# Altium PCB PCB2.0 4mm.PcbDoc
Units mm, origin at the board's own origin, x right, y up, seen from the top; angles counter-clockwise.
Board outline 152.4 x 101.6 mm, 2 copper layers (Top Layer, Bottom Layer); 60 components, 24 nets, 235 pads, 0 vias.
Unrouted connection lines stored in the file: 4.
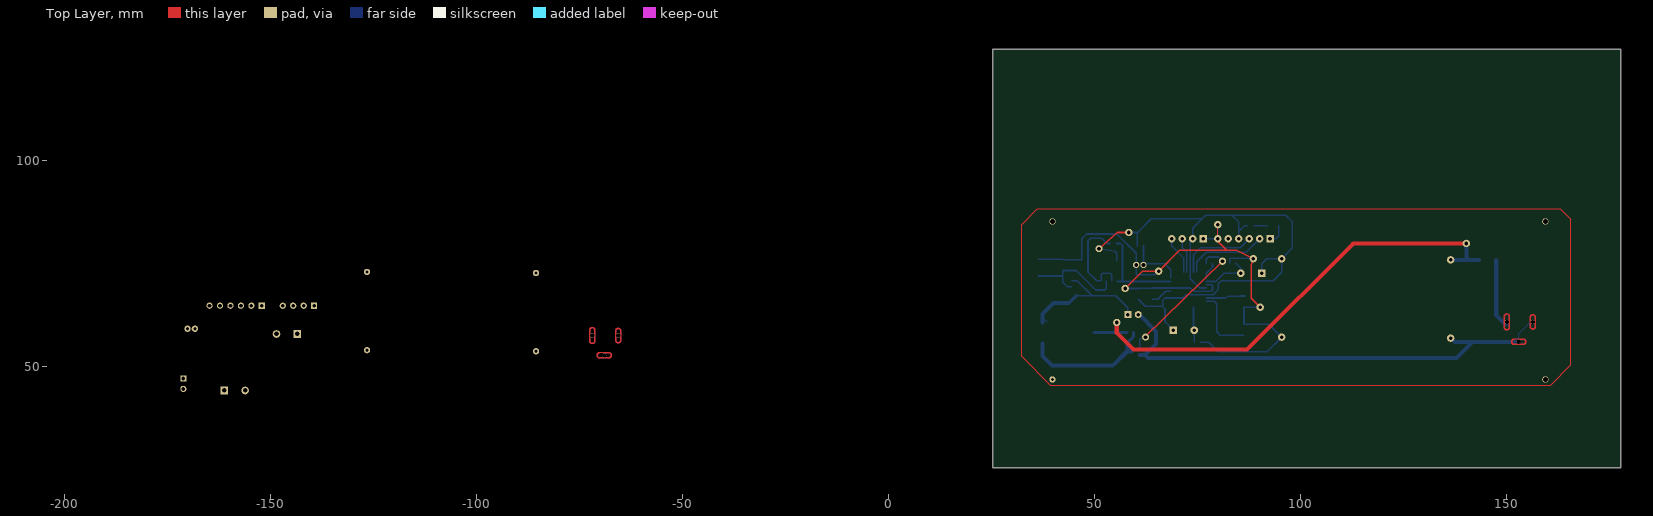
[diagram p0: Top Layer view]
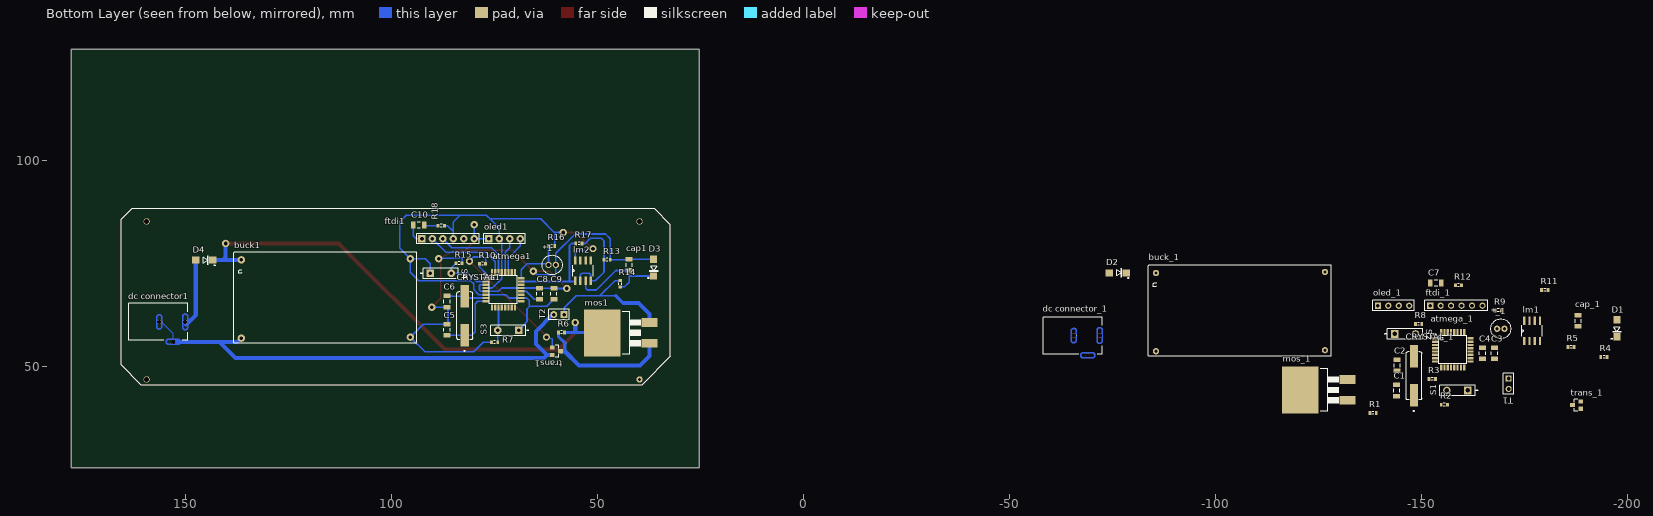
[diagram p1: Bottom Layer view, seen from below]

## Layer stack, top to bottom
Top Solder: solder mask 0.0102, Solder Resist, Dk 3.5
Top Layer: signal copper 0.0356
Dielectric 1: dielectric 0.32, FR-4, Dk 4.8
Bottom Layer: signal copper 0.0356
Bottom Solder: solder mask 0.0102, Solder Resist, Dk 3.5

## Board outline
25.4,25.4 177.8,25.4 177.8,127 25.4,127

## Design rules (kind name [scope] priority, off if disabled: settings)
Clearance Clearance_2 [All] p1: gap=0.1 ignorepadtopadclearanceinfootprint=FALSE
Clearance Clearance_1 [All] p2: gap=0.1 ignorepadtopadclearanceinfootprint=FALSE
Clearance [All] p3: gap=0.1 ignorepadtopadclearanceinfootprint=FALSE
PolygonConnect [All] p1: connectstyle=Relief reliefconductorwidth=0.254 reliefentries=4 polygonreliefangle="90 Angle" airgapwidth=0.254
RoomDefinition soldering_iron [InComponentClass('soldering_iron')] p1: confinementstyle=ConfineOut formatcopy=TRUE lockcomponents=FALSE outline 21.336,110.363 22.872,110.363 22.872,45.593 21.336,45.593
RoutingVias [All] p1: holewidth=0.711 width=1.27 viastyle="Through Hole" minholewidth=0.711 minwidth=1.27 maxholewidth=0.711 maxwidth=1.27
SolderMaskExpansion [All] p1: expansion=0.102
UnRoutedNet [All] p1: checkbadconnections=TRUE
Width [All] p1: maxlimit=0.4 minlimit=0.4 preferedwidth=0.4 minimp=50.000000 maximp=50.000000 favimp=50.000000
29 further rules are at their usual default settings.

## Classes and differential pairs
component class soldering_iron: *1 atmega1 buck1 C5 C6 C8 C9 C10 cap1 CRYSTAL1 D3 D4 "dc connector1" lm2 mos1 oled1 R6 R7 R10 R13 R14 R15 R16 R17 R18 S3 S4 T2 trans1

## Components (designator, comment, footprint, x,y, rotation, side; value= is the part's Value field where it differs from the comment)
*1 "Vibration sensor" PCBComponent_1#1 61.976,74.676 r180 bottom (schematic designator *)
*_1 "Vibration sensor" PCBComponent_1#2 -168.275,59.182 r180 bottom (schematic designator *)
atmega1 "ATMEGA328P-AU" *QFP80P900X900X120-32N 72.91,68.656 r180 bottom (schematic designator atmega)
atmega_1 "ATMEGA328P-AU" *QFP80P900X900X120-32N -157.48,54.051 r180 bottom (schematic designator atmega)
buck1 "buck" buck#1 136.525,75.896 r270 bottom (schematic designator buck)
buck_1 "buck" buck#2 -85.471,72.721 r270 bottom (schematic designator buck)
C1 "Cap Semi" C1206 -143.891,44.196 r270 bottom value=22pF (schematic designator C4)
C2 "Cap Semi" C1206 -144.018,50.292 r90 bottom value=22pF (schematic designator C3)
C3 "Cap Semi" C1206 -167.64,53.213 r90 bottom value=0.1uF (schematic designator C1)
C4 "Cap Semi" C1206 -164.719,53.213 r270 bottom value=0.1uF (schematic designator C2)
C5 "Cap Semi" C1206 86.614,58.928 r270 bottom value=22pF (schematic designator C4)
C6 "Cap Semi" C1206 86.614,65.786 r90 bottom value=22pF (schematic designator C3)
C7 "Cap Semi" C1206 -153.416,70.231 r180 bottom value=0.1uF (schematic designator C5)
C8 "Cap Semi" C1206 64.135,67.691 r270 bottom value=0.1uF (schematic designator C2)
C9 "Cap Semi" C1206 60.706,67.691 r90 bottom value=0.1uF (schematic designator C1)
C10 "Cap Semi" C1206 93.472,84.328 r180 bottom value=0.1uF (schematic designator C5)
cap1 "Cap Semi" C1206 42.418,74.676 r270 bottom value=2.2nF (schematic designator cap)
cap_1 "Cap Semi" C1206 -187.96,61.087 r90 bottom value=2.2nF (schematic designator cap)
CRYSTAL1 "FOXSDLF/160-20" *XTAL_FOXSDLF/160-20 82.308,62.357 r90 bottom (schematic designator CRYSTAL)
CRYSTAL_1 "FOXSDLF/160-20" *XTAL_FOXSDLF/160-20 -148.082,47.752 r90 bottom (schematic designator CRYSTAL)
D1 "SS12-E3/61T" *DO214AC_SS12-E3/61T(Primary) -197.358,59.309 r90 bottom (schematic designator D2)
D2 "SS12-E3/61T" *DO214AC_SS12-E3/61T(Primary) -76.2,72.771 r0 bottom (schematic designator D1)
D3 "SS12-E3/61T" *DO214AC_SS12-E3/61T(Primary) 36.449,74.041 r90 bottom (schematic designator D2)
D4 "SS12-E3/61T" *DO214AC_SS12-E3/61T(Primary) 145.542,75.819 r0 bottom (schematic designator D1)
"dc connector1" "DCJ235-05-A-XX-X_REVA" *GCT_DCJ235-05-A-XX-X_REVA 156.718,60.833 r270 bottom (schematic designator "dc connector")
"dc connector_1" "DCJ235-05-A-XX-X_REVA" *GCT_DCJ235-05-A-XX-X_REVA -65.267,57.531 r270 bottom (schematic designator "dc connector")
ftdi1 "Header 6" HDR1X6#1 92.71,81.026 r180 bottom (schematic designator ftdi)
ftdi_1 "Header 6" HDR1X6#2 -152.019,64.77 r180 bottom (schematic designator ftdi)
lm1 "LM358DR" *SOIC127P600X175-8N -176.784,58.674 r90 bottom (schematic designator lm35dr)
lm2 "LM358DR" *SOIC127P600X175-8N 53.606,73.279 r90 bottom (schematic designator lm35dr)
mos1 "IRF540NPBF" *D2PACK 46.355,58.166 r90 bottom (schematic designator mos)
mos_1 "IRF540NPBF" *D2PACK -123.063,44.323 r90 bottom (schematic designator mos)
oled1 "Header 4" HDR1X4#1 76.454,81.026 r180 bottom (schematic designator oled)
oled_1 "Header 4" HDR1X4#2 -139.319,64.77 r180 bottom (schematic designator oled)
R1 "Res1" J1-0603 -138.176,38.735 r0 bottom value=1K
R2 "Res9" J1-0603 -155.448,40.767 r180 bottom value=1K (schematic designator R9)
R3 "Res 2" J1-0603 -152.527,46.99 r180 bottom value=1K (schematic designator R2)
R4 "Res4" J1-0603 -194.183,52.324 r180 bottom value=1K
R5 "Res6" J1-0603 -186.182,54.737 r180 bottom value=10K (schematic designator R6)
R6 "Res1" J1-0603 58.801,58.293 r180 bottom value=1K (schematic designator R1)
R7 "Res9" J1-0603 75.057,55.88 r180 bottom value=1K (schematic designator R9)
R8 "Res8" J1-0603 -149.225,60.325 r0 bottom value=1K
R9 "Res7" J1-0603 -168.529,63.627 r0 bottom value=10K (schematic designator R7)
R10 "Res 2" J1-0603 77.978,74.93 r0 bottom value=1K (schematic designator R2)
R11 "Res3" J1-0603 -179.832,68.58 r0 bottom value=200K (schematic designator R3)
R12 "Res5" J1-0603 -158.877,69.723 r180 bottom value=10K (schematic designator R5)
R13 "Res4" J1-0603 47.752,75.946 r0 bottom value=1K (schematic designator R4)
R14 "Res6" J1-0603 44.577,70.104 r270 bottom value=10K (schematic designator R6)
R15 "Res8" J1-0603 83.693,75.057 r0 bottom value=1K (schematic designator R8)
R16 "Res7" J1-0603 61.214,79.248 r0 bottom value=10K (schematic designator R7)
R17 "Res3" J1-0603 54.61,79.883 r0 bottom value=200K (schematic designator R3)
R18 "Res5" J1-0603 88.011,84.201 r180 bottom value=10K (schematic designator R5)
S1 "SW-SPST" SPST-2#1 -158.623,44.196 r0 bottom (schematic designator S2)
S2 "SW-SPST" SPST-2#1 -145.923,57.912 r180 bottom (schematic designator S1)
S3 "SW-SPST" SPST-2#2 71.767,58.801 r0 bottom (schematic designator S2)
S4 "SW-SPST" SPST-2#2 88.138,72.644 r180 bottom (schematic designator S1)
T1 "T12" HDR1X2#1 -171.069,47.117 r270 bottom (schematic designator T12)
T2 "T12" HDR1X2#2 58.166,62.611 r0 bottom (schematic designator T12)
trans1 "npn trans" *SOT-23 60.071,53.721 r270 bottom (schematic designator trans)
trans_1 "npn trans" *SOT-23 -187.579,40.64 r90 bottom (schematic designator trans)

## Footprints (in the part's own frame and the unit in brackets; to place one, negate y for a bottom-side part, rotate by r counter-clockwise, add the part's x,y. Pads: shape width x height; smd on the part's side, far side on the other; paste and mask are expansions set on the pad)
*D2PACK [mil]
  rect 82x150 smd: 1(-100,-350) 3(100,-350)
  rect 450x350 smd: 2(0,100)
  silkscreen extent -202,-265 202,-91
*DO214AC_SS12-E3/61T(Primary) [mm]
  rect 1.8x1.7 smd: A(2.05,0) C(-2.05,0)
  silkscreen extent -2.67,-1.05 0.25,1.4
*GCT_DCJ235-05-A-XX-X_REVA [mm]
  rect 0.1x0.1 smd: 1(0,5.95) 2(0,0.9) 3(4.2,3.65)
  round 1 hole 1 unplated: None(0,0.25) None(0,6.55) None(4.8,3.65)
  Top Layer region: 0,6.05 0,5.8 1.3,5.8 1.32,5.8 1.359,5.802 1.398,5.806 1.437,5.812 1.475,5.82 1.513,5.831 1.55,5.843 1.587,5.857 1.623,5.873 1.658,5.891 1.692,5.91 1.725,5.932 1.757,5.955 1.787,5.98 1.816,6.006 1.844,6.034 1.87,6.063 1.895,6.093 1.918,6.125 1.94,6.158 1.959,6.192 1.977,6.227 1.993,6.263 2.007,6.3 2.019,6.337 2.03,6.375 2.038,6.413 2.044,6.452 2.048,6.491 2.05,6.53 2.05,6.55 2.05,6.57 2.048,6.609 2.044,6.648 2.038,6.687 2.03,6.725 2.019,6.763 2.007,6.8 1.993,6.837 1.977,6.873 1.959,6.908 1.94,6.942 1.918,6.975 1.895,7.007 1.87,7.037 1.844,7.066 1.816,7.094 1.787,7.12 1.757,7.145 1.725,7.168 1.692,7.19 1.658,7.209 1.623,7.227 1.587,7.243 1.55,7.257 1.513,7.269 1.475,7.28 1.437,7.288 1.398,7.294 1.359,7.298 1.32,7.3 1.3,7.3 0,7.3 0,7.05 1.3,7.05 1.313,7.05 1.339,7.049 1.365,7.046 1.391,7.042 1.417,7.036 1.442,7.03 1.467,7.021 1.491,7.012 1.515,7.001 1.539,6.99 1.561,6.976 1.583,6.962 1.604,6.947 1.625,6.93 1.644,6.913 1.663,6.894 1.68,6.875 1.697,6.854 1.712,6.833 1.726,6.811 1.74,6.789 1.751,6.765 1.762,6.741 1.771,6.717 1.78,6.692 1.786,6.667 1.792,6.641 1.796,6.615 1.799,6.589 1.8,6.563 1.8,6.55 1.8,6.537 1.799,6.511 1.796,6.485 1.792,6.459 1.786,6.433 1.78,6.408 1.771,6.383 1.762,6.359 1.751,6.335 1.74,6.311 1.726,6.289 1.712,6.267 1.697,6.246 1.68,6.225 1.663,6.206 1.644,6.187 1.625,6.17 1.604,6.153 1.583,6.138 1.561,6.124 1.539,6.11 1.515,6.099 1.491,6.088 1.467,6.079 1.442,6.07 1.417,6.064 1.391,6.058 1.365,6.054 1.339,6.051 1.313,6.05 1.3,6.05 0,6.05
  Top Layer region: 0,7.05 0,7.3 -1.3,7.3 -1.32,7.3 -1.359,7.298 -1.398,7.294 -1.437,7.288 -1.475,7.28 -1.513,7.269 -1.55,7.257 -1.587,7.243 -1.623,7.227 -1.658,7.209 -1.692,7.19 -1.725,7.168 -1.757,7.145 -1.787,7.12 -1.816,7.094 -1.844,7.066 -1.87,7.037 -1.895,7.007 -1.918,6.975 -1.94,6.942 -1.959,6.908 -1.977,6.873 -1.993,6.837 -2.007,6.8 -2.019,6.763 -2.03,6.725 -2.038,6.687 -2.044,6.648 -2.048,6.609 -2.05,6.57 -2.05,6.55 -2.05,6.53 -2.048,6.491 -2.044,6.452 -2.038,6.413 -2.03,6.375 -2.019,6.337 -2.007,6.3 -1.993,6.263 -1.977,6.227 -1.959,6.192 -1.94,6.158 -1.918,6.125 -1.895,6.093 -1.87,6.063 -1.844,6.034 -1.816,6.006 -1.787,5.98 -1.757,5.955 -1.725,5.932 -1.692,5.91 -1.658,5.891 -1.623,5.873 -1.587,5.857 -1.55,5.843 -1.513,5.831 -1.475,5.82 -1.437,5.812 -1.398,5.806 -1.359,5.802 -1.32,5.8 -1.3,5.8 0,5.8 0,6.05 -1.3,6.05 -1.313,6.05 -1.339,6.051 -1.365,6.054 -1.391,6.058 -1.417,6.064 -1.442,6.07 -1.467,6.079 -1.491,6.088 -1.515,6.099 -1.539,6.11 -1.561,6.124 -1.583,6.138 -1.604,6.153 -1.625,6.17 -1.644,6.187 -1.663,6.206 -1.68,6.225 -1.697,6.246 -1.712,6.267 -1.726,6.289 -1.74,6.311 -1.751,6.335 -1.762,6.359 -1.771,6.383 -1.78,6.408 -1.786,6.433 -1.792,6.459 -1.796,6.485 -1.799,6.511 -1.8,6.537 -1.8,6.55 -1.8,6.563 -1.799,6.589 -1.796,6.615 -1.792,6.641 -1.786,6.667 -1.78,6.692 -1.771,6.717 -1.762,6.741 -1.751,6.765 -1.74,6.789 -1.726,6.811 -1.712,6.833 -1.697,6.854 -1.68,6.875 -1.663,6.894 -1.644,6.913 -1.625,6.93 -1.604,6.947 -1.583,6.962 -1.561,6.976 -1.539,6.99 -1.515,7.001 -1.491,7.012 -1.467,7.021 -1.442,7.03 -1.417,7.036 -1.391,7.042 -1.365,7.046 -1.339,7.049 -1.313,7.05 -1.3,7.05 0,7.05
  Top Layer region: 5.3,3.65 5.55,3.65 5.55,4.75 5.55,4.77 5.548,4.809 5.544,4.848 5.538,4.887 5.53,4.925 5.519,4.963 5.507,5 5.493,5.037 5.477,5.073 5.459,5.108 5.44,5.142 5.418,5.175 5.395,5.207 5.37,5.237 5.344,5.266 5.316,5.294 5.287,5.32 5.257,5.345 5.225,5.368 5.192,5.39 5.158,5.409 5.123,5.427 5.087,5.443 5.05,5.457 5.013,5.469 4.975,5.48 4.937,5.488 4.898,5.494 4.859,5.498 4.82,5.5 4.8,5.5 4.78,5.5 4.741,5.498 4.702,5.494 4.663,5.488 4.625,5.48 4.587,5.469 4.55,5.457 4.513,5.443 4.477,5.427 4.442,5.409 4.408,5.39 4.375,5.368 4.343,5.345 4.313,5.32 4.284,5.294 4.256,5.266 4.229,5.237 4.205,5.207 4.182,5.175 4.16,5.142 4.141,5.108 4.123,5.073 4.107,5.037 4.093,5 4.081,4.963 4.07,4.925 4.062,4.887 4.056,4.848 4.052,4.809 4.05,4.77 4.05,4.75 4.05,3.65 4.3,3.65 4.3,4.75 4.3,4.763 4.301,4.789 4.304,4.815 4.308,4.841 4.314,4.867 4.32,4.892 4.329,4.917 4.338,4.941 4.349,4.965 4.36,4.989 4.374,5.011 4.388,5.033 4.403,5.054 4.42,5.075 4.437,5.094 4.456,5.113 4.475,5.13 4.496,5.147 4.517,5.162 4.539,5.176 4.561,5.19 4.585,5.201 4.609,5.212 4.633,5.221 4.658,5.23 4.683,5.236 4.709,5.242 4.735,5.246 4.761,5.249 4.787,5.25 4.8,5.25 4.813,5.25 4.839,5.249 4.865,5.246 4.891,5.242 4.917,5.236 4.942,5.23 4.967,5.221 4.991,5.212 5.015,5.201 5.039,5.19 5.061,5.176 5.083,5.162 5.104,5.147 5.125,5.13 5.144,5.113 5.163,5.094 5.18,5.075 5.197,5.054 5.212,5.033 5.226,5.011 5.24,4.989 5.251,4.965 5.262,4.941 5.271,4.917 5.28,4.892 5.286,4.867 5.292,4.841 5.296,4.815 5.299,4.789 5.3,4.763 5.3,4.75 5.3,3.65
  Top Layer region: 4.3,3.65 4.05,3.65 4.05,2.55 4.05,2.53 4.052,2.491 4.056,2.452 4.062,2.413 4.07,2.375 4.081,2.337 4.093,2.3 4.107,2.263 4.123,2.227 4.141,2.192 4.16,2.158 4.182,2.125 4.205,2.093 4.229,2.063 4.256,2.034 4.284,2.006 4.313,1.98 4.343,1.955 4.375,1.932 4.408,1.91 4.442,1.891 4.477,1.873 4.513,1.857 4.55,1.843 4.587,1.831 4.625,1.82 4.663,1.812 4.702,1.806 4.741,1.802 4.78,1.8 4.8,1.8 4.82,1.8 4.859,1.802 4.898,1.806 4.937,1.812 4.975,1.82 5.013,1.831 5.05,1.843 5.087,1.857 5.123,1.873 5.158,1.891 5.192,1.91 5.225,1.932 5.257,1.955 5.287,1.98 5.316,2.006 5.344,2.034 5.37,2.063 5.395,2.093 5.418,2.125 5.44,2.158 5.459,2.192 5.477,2.227 5.493,2.263 5.507,2.3 5.519,2.337 5.53,2.375 5.538,2.413 5.544,2.452 5.548,2.491 5.55,2.53 5.55,2.55 5.55,3.65 5.3,3.65 5.3,2.55 5.3,2.537 5.299,2.511 5.296,2.485 5.292,2.459 5.286,2.433 5.28,2.408 5.271,2.383 5.262,2.359 5.251,2.335 5.24,2.311 5.226,2.289 5.212,2.267 5.197,2.246 5.18,2.225 5.163,2.206 5.144,2.187 5.125,2.17 5.104,2.153 5.083,2.138 5.061,2.124 5.039,2.11 5.015,2.099 4.991,2.088 4.967,2.079 4.942,2.07 4.917,2.064 4.891,2.058 4.865,2.054 4.839,2.051 4.813,2.05 4.8,2.05 4.787,2.05 4.761,2.051 4.735,2.054 4.709,2.058 4.683,2.064 4.658,2.07 4.633,2.079 4.609,2.088 4.585,2.099 4.561,2.11 4.539,2.124 4.517,2.138 4.496,2.153 4.475,2.17 4.456,2.187 4.437,2.206 4.42,2.225 4.403,2.246 4.388,2.267 4.374,2.289 4.36,2.311 4.349,2.335 4.338,2.359 4.329,2.383 4.32,2.408 4.314,2.433 4.308,2.459 4.304,2.485 4.301,2.511 4.3,2.537 4.3,2.55 4.3,3.65
  Top Layer region: 0,-0.25 0,-0.5 1.1,-0.5 1.12,-0.5 1.159,-0.498 1.198,-0.494 1.237,-0.488 1.275,-0.48 1.313,-0.469 1.35,-0.457 1.387,-0.443 1.423,-0.427 1.458,-0.409 1.492,-0.39 1.525,-0.368 1.557,-0.345 1.587,-0.321 1.616,-0.294 1.644,-0.266 1.67,-0.237 1.695,-0.207 1.718,-0.175 1.74,-0.142 1.759,-0.108 1.777,-0.073 1.793,-0.037 1.807,0 1.819,0.037 1.83,0.075 1.838,0.113 1.844,0.152 1.848,0.191 1.85,0.23 1.85,0.25 1.85,0.27 1.848,0.309 1.844,0.348 1.838,0.387 1.83,0.425 1.819,0.463 1.807,0.5 1.793,0.537 1.777,0.573 1.759,0.608 1.74,0.642 1.718,0.675 1.695,0.707 1.67,0.737 1.644,0.766 1.616,0.794 1.587,0.82 1.557,0.845 1.525,0.868 1.492,0.89 1.458,0.909 1.423,0.927 1.387,0.943 1.35,0.957 1.313,0.969 1.275,0.98 1.237,0.988 1.198,0.994 1.159,0.998 1.12,1 1.1,1 0,1 0,0.75 1.1,0.75 1.113,0.75 1.139,0.749 1.165,0.746 1.191,0.742 1.217,0.736 1.242,0.73 1.267,0.721 1.291,0.712 1.315,0.701 1.339,0.69 1.361,0.676 1.383,0.662 1.404,0.647 1.425,0.63 1.444,0.613 1.463,0.594 1.48,0.575 1.497,0.554 1.512,0.533 1.526,0.511 1.54,0.489 1.551,0.465 1.562,0.441 1.571,0.417 1.58,0.392 1.586,0.367 1.592,0.341 1.596,0.315 1.599,0.289 1.6,0.263 1.6,0.25 1.6,0.237 1.599,0.211 1.596,0.185 1.592,0.159 1.586,0.133 1.58,0.108 1.571,0.083 1.562,0.059 1.551,0.035 1.54,0.011 1.526,-0.011 1.512,-0.033 1.497,-0.054 1.48,-0.075 1.463,-0.094 1.444,-0.113 1.425,-0.13 1.404,-0.147 1.383,-0.162 1.361,-0.176 1.339,-0.19 1.315,-0.201 1.291,-0.212 1.267,-0.221 1.242,-0.23 1.217,-0.236 1.191,-0.242 1.165,-0.246 1.139,-0.249 1.113,-0.25 1.1,-0.25 0,-0.25
  Top Layer region: 0,0.75 0,1 -1.1,1 -1.12,1 -1.159,0.998 -1.198,0.994 -1.237,0.988 -1.275,0.98 -1.313,0.969 -1.35,0.957 -1.387,0.943 -1.423,0.927 -1.458,0.909 -1.492,0.89 -1.525,0.868 -1.557,0.845 -1.587,0.821 -1.616,0.794 -1.644,0.766 -1.67,0.737 -1.695,0.707 -1.718,0.675 -1.74,0.642 -1.759,0.608 -1.777,0.573 -1.793,0.537 -1.807,0.5 -1.819,0.463 -1.83,0.425 -1.838,0.387 -1.844,0.348 -1.848,0.309 -1.85,0.27 -1.85,0.25 -1.85,0.23 -1.848,0.191 -1.844,0.152 -1.838,0.113 -1.83,0.075 -1.819,0.037 -1.807,0 -1.793,-0.037 -1.777,-0.073 -1.759,-0.108 -1.74,-0.142 -1.718,-0.175 -1.695,-0.207 -1.67,-0.237 -1.644,-0.266 -1.616,-0.294 -1.587,-0.32 -1.557,-0.345 -1.525,-0.368 -1.492,-0.39 -1.458,-0.409 -1.423,-0.427 -1.387,-0.443 -1.35,-0.457 -1.313,-0.469 -1.275,-0.48 -1.237,-0.488 -1.198,-0.494 -1.159,-0.498 -1.12,-0.5 -1.1,-0.5 0,-0.5 0,-0.25 -1.1,-0.25 -1.113,-0.25 -1.139,-0.249 -1.165,-0.246 -1.191,-0.242 -1.217,-0.236 -1.242,-0.23 -1.267,-0.221 -1.291,-0.212 -1.315,-0.201 -1.339,-0.19 -1.361,-0.176 -1.383,-0.162 -1.404,-0.147 -1.425,-0.13 -1.444,-0.113 -1.463,-0.094 -1.48,-0.075 -1.497,-0.054 -1.512,-0.033 -1.526,-0.011 -1.54,0.011 -1.551,0.035 -1.562,0.059 -1.571,0.083 -1.58,0.108 -1.586,0.133 -1.592,0.159 -1.596,0.185 -1.599,0.211 -1.6,0.237 -1.6,0.25 -1.6,0.263 -1.599,0.289 -1.596,0.315 -1.592,0.341 -1.586,0.367 -1.58,0.392 -1.571,0.417 -1.562,0.441 -1.551,0.465 -1.54,0.489 -1.526,0.511 -1.512,0.533 -1.497,0.554 -1.48,0.575 -1.463,0.594 -1.444,0.613 -1.425,0.63 -1.404,0.647 -1.383,0.662 -1.361,0.676 -1.339,0.69 -1.315,0.701 -1.291,0.712 -1.267,0.721 -1.242,0.73 -1.217,0.736 -1.191,0.742 -1.165,0.746 -1.139,0.749 -1.113,0.75 -1.1,0.75 0,0.75
  Bottom Layer region: 0,6.05 0,5.8 1.3,5.8 1.32,5.8 1.359,5.802 1.398,5.806 1.437,5.812 1.475,5.82 1.513,5.831 1.55,5.843 1.587,5.857 1.623,5.873 1.658,5.891 1.692,5.91 1.725,5.932 1.757,5.955 1.787,5.98 1.816,6.006 1.844,6.034 1.87,6.063 1.895,6.093 1.918,6.125 1.94,6.158 1.959,6.192 1.977,6.227 1.993,6.263 2.007,6.3 2.019,6.337 2.03,6.375 2.038,6.413 2.044,6.452 2.048,6.491 2.05,6.53 2.05,6.55 2.05,6.57 2.048,6.609 2.044,6.648 2.038,6.687 2.03,6.725 2.019,6.763 2.007,6.8 1.993,6.837 1.977,6.873 1.959,6.908 1.94,6.942 1.918,6.975 1.895,7.007 1.87,7.037 1.844,7.066 1.816,7.094 1.787,7.12 1.757,7.145 1.725,7.168 1.692,7.19 1.658,7.209 1.623,7.227 1.587,7.243 1.55,7.257 1.513,7.269 1.475,7.28 1.437,7.288 1.398,7.294 1.359,7.298 1.32,7.3 1.3,7.3 0,7.3 0,7.05 1.3,7.05 1.313,7.05 1.339,7.049 1.365,7.046 1.391,7.042 1.417,7.036 1.442,7.03 1.467,7.021 1.491,7.012 1.515,7.001 1.539,6.99 1.561,6.976 1.583,6.962 1.604,6.947 1.625,6.93 1.644,6.913 1.663,6.894 1.68,6.875 1.697,6.854 1.712,6.833 1.726,6.811 1.74,6.789 1.751,6.765 1.762,6.741 1.771,6.717 1.78,6.692 1.786,6.667 1.792,6.641 1.796,6.615 1.799,6.589 1.8,6.563 1.8,6.55 1.8,6.537 1.799,6.511 1.796,6.485 1.792,6.459 1.786,6.433 1.78,6.408 1.771,6.383 1.762,6.359 1.751,6.335 1.74,6.311 1.726,6.289 1.712,6.267 1.697,6.246 1.68,6.225 1.663,6.206 1.644,6.187 1.625,6.17 1.604,6.153 1.583,6.138 1.561,6.124 1.539,6.11 1.515,6.099 1.491,6.088 1.467,6.079 1.442,6.07 1.417,6.064 1.391,6.058 1.365,6.054 1.339,6.051 1.313,6.05 1.3,6.05 0,6.05
  Bottom Layer region: 0,7.05 0,7.3 -1.3,7.3 -1.32,7.3 -1.359,7.298 -1.398,7.294 -1.437,7.288 -1.475,7.28 -1.513,7.269 -1.55,7.257 -1.587,7.243 -1.623,7.227 -1.658,7.209 -1.692,7.19 -1.725,7.168 -1.757,7.145 -1.787,7.12 -1.816,7.094 -1.844,7.066 -1.87,7.037 -1.895,7.007 -1.918,6.975 -1.94,6.942 -1.959,6.908 -1.977,6.873 -1.993,6.837 -2.007,6.8 -2.019,6.763 -2.03,6.725 -2.038,6.687 -2.044,6.648 -2.048,6.609 -2.05,6.57 -2.05,6.55 -2.05,6.53 -2.048,6.491 -2.044,6.452 -2.038,6.413 -2.03,6.375 -2.019,6.337 -2.007,6.3 -1.993,6.263 -1.977,6.227 -1.959,6.192 -1.94,6.158 -1.918,6.125 -1.895,6.093 -1.87,6.063 -1.844,6.034 -1.816,6.006 -1.787,5.98 -1.757,5.955 -1.725,5.932 -1.692,5.91 -1.658,5.891 -1.623,5.873 -1.587,5.857 -1.55,5.843 -1.513,5.831 -1.475,5.82 -1.437,5.812 -1.398,5.806 -1.359,5.802 -1.32,5.8 -1.3,5.8 0,5.8 0,6.05 -1.3,6.05 -1.313,6.05 -1.339,6.051 -1.365,6.054 -1.391,6.058 -1.417,6.064 -1.442,6.07 -1.467,6.079 -1.491,6.088 -1.515,6.099 -1.539,6.11 -1.561,6.124 -1.583,6.138 -1.604,6.153 -1.625,6.17 -1.644,6.187 -1.663,6.206 -1.68,6.225 -1.697,6.246 -1.712,6.267 -1.726,6.289 -1.74,6.311 -1.751,6.335 -1.762,6.359 -1.771,6.383 -1.78,6.408 -1.786,6.433 -1.792,6.459 -1.796,6.485 -1.799,6.511 -1.8,6.537 -1.8,6.55 -1.8,6.563 -1.799,6.589 -1.796,6.615 -1.792,6.641 -1.786,6.667 -1.78,6.692 -1.771,6.717 -1.762,6.741 -1.751,6.765 -1.74,6.789 -1.726,6.811 -1.712,6.833 -1.697,6.854 -1.68,6.875 -1.663,6.894 -1.644,6.913 -1.625,6.93 -1.604,6.947 -1.583,6.962 -1.561,6.976 -1.539,6.99 -1.515,7.001 -1.491,7.012 -1.467,7.021 -1.442,7.03 -1.417,7.036 -1.391,7.042 -1.365,7.046 -1.339,7.049 -1.313,7.05 -1.3,7.05 0,7.05
  Bottom Layer region: 5.3,3.65 5.55,3.65 5.55,4.75 5.55,4.77 5.548,4.809 5.544,4.848 5.538,4.887 5.53,4.925 5.519,4.963 5.507,5 5.493,5.037 5.477,5.073 5.459,5.108 5.44,5.142 5.418,5.175 5.395,5.207 5.37,5.237 5.344,5.266 5.316,5.294 5.287,5.32 5.257,5.345 5.225,5.368 5.192,5.39 5.158,5.409 5.123,5.427 5.087,5.443 5.05,5.457 5.013,5.469 4.975,5.48 4.937,5.488 4.898,5.494 4.859,5.498 4.82,5.5 4.8,5.5 4.78,5.5 4.741,5.498 4.702,5.494 4.663,5.488 4.625,5.48 4.587,5.469 4.55,5.457 4.513,5.443 4.477,5.427 4.442,5.409 4.408,5.39 4.375,5.368 4.343,5.345 4.313,5.32 4.284,5.294 4.256,5.266 4.229,5.237 4.205,5.207 4.182,5.175 4.16,5.142 4.141,5.108 4.123,5.073 4.107,5.037 4.093,5 4.081,4.963 4.07,4.925 4.062,4.887 4.056,4.848 4.052,4.809 4.05,4.77 4.05,4.75 4.05,3.65 4.3,3.65 4.3,4.75 4.3,4.763 4.301,4.789 4.304,4.815 4.308,4.841 4.314,4.867 4.32,4.892 4.329,4.917 4.338,4.941 4.349,4.965 4.36,4.989 4.374,5.011 4.388,5.033 4.403,5.054 4.42,5.075 4.437,5.094 4.456,5.113 4.475,5.13 4.496,5.147 4.517,5.162 4.539,5.176 4.561,5.19 4.585,5.201 4.609,5.212 4.633,5.221 4.658,5.23 4.683,5.236 4.709,5.242 4.735,5.246 4.761,5.249 4.787,5.25 4.8,5.25 4.813,5.25 4.839,5.249 4.865,5.246 4.891,5.242 4.917,5.236 4.942,5.23 4.967,5.221 4.991,5.212 5.015,5.201 5.039,5.19 5.061,5.176 5.083,5.162 5.104,5.147 5.125,5.13 5.144,5.113 5.163,5.094 5.18,5.075 5.197,5.054 5.212,5.033 5.226,5.011 5.24,4.989 5.251,4.965 5.262,4.941 5.271,4.917 5.28,4.892 5.286,4.867 5.292,4.841 5.296,4.815 5.299,4.789 5.3,4.763 5.3,4.75 5.3,3.65
  Bottom Layer region: 4.3,3.65 4.05,3.65 4.05,2.55 4.05,2.53 4.052,2.491 4.056,2.452 4.062,2.413 4.07,2.375 4.081,2.337 4.093,2.3 4.107,2.263 4.123,2.227 4.141,2.192 4.16,2.158 4.182,2.125 4.205,2.093 4.229,2.063 4.256,2.034 4.284,2.006 4.313,1.98 4.343,1.955 4.375,1.932 4.408,1.91 4.442,1.891 4.477,1.873 4.513,1.857 4.55,1.843 4.587,1.831 4.625,1.82 4.663,1.812 4.702,1.806 4.741,1.802 4.78,1.8 4.8,1.8 4.82,1.8 4.859,1.802 4.898,1.806 4.937,1.812 4.975,1.82 5.013,1.831 5.05,1.843 5.087,1.857 5.123,1.873 5.158,1.891 5.192,1.91 5.225,1.932 5.257,1.955 5.287,1.98 5.316,2.006 5.344,2.034 5.37,2.063 5.395,2.093 5.418,2.125 5.44,2.158 5.459,2.192 5.477,2.227 5.493,2.263 5.507,2.3 5.519,2.337 5.53,2.375 5.538,2.413 5.544,2.452 5.548,2.491 5.55,2.53 5.55,2.55 5.55,3.65 5.3,3.65 5.3,2.55 5.3,2.537 5.299,2.511 5.296,2.485 5.292,2.459 5.286,2.433 5.28,2.408 5.271,2.383 5.262,2.359 5.251,2.335 5.24,2.311 5.226,2.289 5.212,2.267 5.197,2.246 5.18,2.225 5.163,2.206 5.144,2.187 5.125,2.17 5.104,2.153 5.083,2.138 5.061,2.124 5.039,2.11 5.015,2.099 4.991,2.088 4.967,2.079 4.942,2.07 4.917,2.064 4.891,2.058 4.865,2.054 4.839,2.051 4.813,2.05 4.8,2.05 4.787,2.05 4.761,2.051 4.735,2.054 4.709,2.058 4.683,2.064 4.658,2.07 4.633,2.079 4.609,2.088 4.585,2.099 4.561,2.11 4.539,2.124 4.517,2.138 4.496,2.153 4.475,2.17 4.456,2.187 4.437,2.206 4.42,2.225 4.403,2.246 4.388,2.267 4.374,2.289 4.36,2.311 4.349,2.335 4.338,2.359 4.329,2.383 4.32,2.408 4.314,2.433 4.308,2.459 4.304,2.485 4.301,2.511 4.3,2.537 4.3,2.55 4.3,3.65
  Bottom Layer region: 0,-0.25 0,-0.5 1.1,-0.5 1.12,-0.5 1.159,-0.498 1.198,-0.494 1.237,-0.488 1.275,-0.48 1.313,-0.469 1.35,-0.457 1.387,-0.443 1.423,-0.427 1.458,-0.409 1.492,-0.39 1.525,-0.368 1.557,-0.345 1.587,-0.321 1.616,-0.294 1.644,-0.266 1.67,-0.237 1.695,-0.207 1.718,-0.175 1.74,-0.142 1.759,-0.108 1.777,-0.073 1.793,-0.037 1.807,0 1.819,0.037 1.83,0.075 1.838,0.113 1.844,0.152 1.848,0.191 1.85,0.23 1.85,0.25 1.85,0.27 1.848,0.309 1.844,0.348 1.838,0.387 1.83,0.425 1.819,0.463 1.807,0.5 1.793,0.537 1.777,0.573 1.759,0.608 1.74,0.642 1.718,0.675 1.695,0.707 1.67,0.737 1.644,0.766 1.616,0.794 1.587,0.82 1.557,0.845 1.525,0.868 1.492,0.89 1.458,0.909 1.423,0.927 1.387,0.943 1.35,0.957 1.313,0.969 1.275,0.98 1.237,0.988 1.198,0.994 1.159,0.998 1.12,1 1.1,1 0,1 0,0.75 1.1,0.75 1.113,0.75 1.139,0.749 1.165,0.746 1.191,0.742 1.217,0.736 1.242,0.73 1.267,0.721 1.291,0.712 1.315,0.701 1.339,0.69 1.361,0.676 1.383,0.662 1.404,0.647 1.425,0.63 1.444,0.613 1.463,0.594 1.48,0.575 1.497,0.554 1.512,0.533 1.526,0.511 1.54,0.489 1.551,0.465 1.562,0.441 1.571,0.417 1.58,0.392 1.586,0.367 1.592,0.341 1.596,0.315 1.599,0.289 1.6,0.263 1.6,0.25 1.6,0.237 1.599,0.211 1.596,0.185 1.592,0.159 1.586,0.133 1.58,0.108 1.571,0.083 1.562,0.059 1.551,0.035 1.54,0.011 1.526,-0.011 1.512,-0.033 1.497,-0.054 1.48,-0.075 1.463,-0.094 1.444,-0.113 1.425,-0.13 1.404,-0.147 1.383,-0.162 1.361,-0.176 1.339,-0.19 1.315,-0.201 1.291,-0.212 1.267,-0.221 1.242,-0.23 1.217,-0.236 1.191,-0.242 1.165,-0.246 1.139,-0.249 1.113,-0.25 1.1,-0.25 0,-0.25
  Bottom Layer region: 0,0.75 0,1 -1.1,1 -1.12,1 -1.159,0.998 -1.198,0.994 -1.237,0.988 -1.275,0.98 -1.313,0.969 -1.35,0.957 -1.387,0.943 -1.423,0.927 -1.458,0.909 -1.492,0.89 -1.525,0.868 -1.557,0.845 -1.587,0.821 -1.616,0.794 -1.644,0.766 -1.67,0.737 -1.695,0.707 -1.718,0.675 -1.74,0.642 -1.759,0.608 -1.777,0.573 -1.793,0.537 -1.807,0.5 -1.819,0.463 -1.83,0.425 -1.838,0.387 -1.844,0.348 -1.848,0.309 -1.85,0.27 -1.85,0.25 -1.85,0.23 -1.848,0.191 -1.844,0.152 -1.838,0.113 -1.83,0.075 -1.819,0.037 -1.807,0 -1.793,-0.037 -1.777,-0.073 -1.759,-0.108 -1.74,-0.142 -1.718,-0.175 -1.695,-0.207 -1.67,-0.237 -1.644,-0.266 -1.616,-0.294 -1.587,-0.32 -1.557,-0.345 -1.525,-0.368 -1.492,-0.39 -1.458,-0.409 -1.423,-0.427 -1.387,-0.443 -1.35,-0.457 -1.313,-0.469 -1.275,-0.48 -1.237,-0.488 -1.198,-0.494 -1.159,-0.498 -1.12,-0.5 -1.1,-0.5 0,-0.5 0,-0.25 -1.1,-0.25 -1.113,-0.25 -1.139,-0.249 -1.165,-0.246 -1.191,-0.242 -1.217,-0.236 -1.242,-0.23 -1.267,-0.221 -1.291,-0.212 -1.315,-0.201 -1.339,-0.19 -1.361,-0.176 -1.383,-0.162 -1.404,-0.147 -1.425,-0.13 -1.444,-0.113 -1.463,-0.094 -1.48,-0.075 -1.497,-0.054 -1.512,-0.033 -1.526,-0.011 -1.54,0.011 -1.551,0.035 -1.562,0.059 -1.571,0.083 -1.58,0.108 -1.586,0.133 -1.592,0.159 -1.596,0.185 -1.599,0.211 -1.6,0.237 -1.6,0.25 -1.6,0.263 -1.599,0.289 -1.596,0.315 -1.592,0.341 -1.586,0.367 -1.58,0.392 -1.571,0.417 -1.562,0.441 -1.551,0.465 -1.54,0.489 -1.526,0.511 -1.512,0.533 -1.497,0.554 -1.48,0.575 -1.463,0.594 -1.444,0.613 -1.425,0.63 -1.404,0.647 -1.383,0.662 -1.361,0.676 -1.339,0.69 -1.315,0.701 -1.291,0.712 -1.267,0.721 -1.242,0.73 -1.217,0.736 -1.191,0.742 -1.165,0.746 -1.139,0.749 -1.113,0.75 -1.1,0.75 0,0.75
  silkscreen extent -4.5,-7.15 4.5,7.15
*QFP80P900X900X120-32N [mm]
  rect 1.5x0.55 smd: 1(-4.3,2.8) 2(-4.3,2) 3(-4.3,1.2) 4(-4.3,0.4) 5(-4.3,-0.4) 6(-4.3,-1.2) 7(-4.3,-2) 8(-4.3,-2.8) 17(4.3,-2.8) 18(4.3,-2) 19(4.3,-1.2) 20(4.3,-0.4) 21(4.3,0.4) 22(4.3,1.2) 23(4.3,2) 24(4.3,2.8)
  rect 0.55x1.5 smd: 9(-2.8,-4.3) 10(-2,-4.3) 11(-1.2,-4.3) 12(-0.4,-4.3) 13(0.4,-4.3) 14(1.2,-4.3) 15(2,-4.3) 16(2.8,-4.3) 25(2.8,4.3) 26(2,4.3) 27(1.2,4.3) 28(0.4,4.3) 29(-0.4,4.3) 30(-1.2,4.3) 31(-2,4.3) 32(-2.8,4.3)
  silkscreen extent -4.75,-3.4 3.4,4
*SOIC127P600X175-8N [mil]
  rect 78x22 smd: 1(-97,75) 2(-97,25) 3(-97,-25) 4(-97,-75) 5(97,-75) 6(97,-25) 7(97,25) 8(97,75)
  silkscreen extent -54,-98 54,98
*SOT-23 [mil]
  rect 40x45 smd: 1(-35,-40) 2(35,-40) 3(0,40)
  silkscreen extent -58,-10 58,25
*XTAL_FOXSDLF/160-20 [mm]
  rect 5.5x2 smd: 1(-4.75,0) 2(4.75,0)
  silkscreen extent -8.6,-1.9 5.85,1.9
buck#1 [mm] "buck"
  round 1.8 hole 0.9: 1(0,0) 2(19,0) 3(-0.254,41.021) 4(18.746,41.021)
  silkscreen extent -1.91,-1.91 20.19,42.55
buck#2 [mm] "buck"
  round 1.524 hole 0.762: 1(0,0) 2(19,0) 3(-0.254,41.021) 4(18.746,41.021)
  silkscreen extent -1.91,-1.91 20.19,42.55
C1206 [mm] "Chip Capacitor, Body 3.2x1.6mm, IPC High Density"
  rect 1.1x1.7 smd: 1(-1.35,0) 2(1.35,0)
  silkscreen extent -0.4,-0.75 0.4,0.75, body extent -1.7,-0.9 1.7,0.9, height 1.3
HDR1X2#1 [mm] "Connector; Header; 2 Position"
  rect 1.5x1.5 hole 0.9: 1(0,0)
  round 1.5 hole 0.9: 2(2.54,0)
  silkscreen extent -1.27,-1.27 3.81,1.27
HDR1X2#2 [mm] "Connector; Header; 2 Position"
  rect 1.7x1.7 hole 0.9: 1(0,0)
  round 1.7 hole 0.9: 2(2.54,0)
  silkscreen extent -1.27,-1.27 3.81,1.27
HDR1X4#1 [mm] "Connector; Header; 4 Position"
  rect 1.8x1.8 hole 0.9: 1(0,0)
  round 1.8 hole 0.9: 2(2.54,0) 3(5.08,0) 4(7.62,0)
  silkscreen extent -1.27,-1.27 8.89,1.27
HDR1X4#2 [mm] "Connector; Header; 4 Position"
  rect 1.5x1.5 hole 0.9: 1(0,0)
  round 1.5 hole 0.9: 2(2.54,0) 3(5.08,0) 4(7.62,0)
  silkscreen extent -1.27,-1.27 8.89,1.27
HDR1X6#1 [mm] "Connector; Header; 6 Position"
  rect 1.8x1.8 hole 0.9: 1(0,0)
  round 1.8 hole 0.9: 2(2.54,0) 3(5.08,0) 4(7.62,0) 5(10.16,0) 6(12.7,0)
  silkscreen extent -1.27,-1.27 13.97,1.27
HDR1X6#2 [mm] "Connector; Header; 6 Position"
  rect 1.5x1.5 hole 0.9: 1(0,0)
  round 1.5 hole 0.9: 2(2.54,0) 3(5.08,0) 4(7.62,0) 5(10.16,0) 6(12.7,0)
  silkscreen extent -1.27,-1.27 13.97,1.27
J1-0603 [mm] "Chip Resistor, Body 1.6x0.8mm, IPC High Density"
  rect 0.7x0.9 smd: 1(-0.75,0) 2(0.75,0)
  silkscreen extent -0.2,-0.35 0.2,0.35, body extent -0.85,-0.48 0.85,0.48, height 0.9
PCBComponent_1#1 [mil]
  round 60 hole 35.43: 1(0,0) 2(70,0)
  silkscreen extent -60,-95 130,95, body extent -60,-95 130,95, height 591
PCBComponent_1#2 [mil]
  round 60 hole 30: 1(0,0) 2(70,0)
  silkscreen extent -60,-95 130,95, body extent -60,-95 130,95, height 591
SPST-2#1 [mm] "Switch; 2 Leads"
  rect 1.85x1.85 hole 1.1: 1(-2.54,0)
  round 1.85 hole 1.1: 2(2.54,0)
  silkscreen extent -4.89,-1.27 4.28,1.27
SPST-2#2 [mm] "Switch; 2 Leads"
  rect 1.85x1.85 hole 0.9: 1(-2.54,0)
  round 1.85 hole 0.9: 2(2.54,0)
  silkscreen extent -4.89,-1.27 4.28,1.27

## Part data
*1 *_1: library part Component_1
atmega1 atmega_1: "Microcontroller Mcu, 8 Bit, Atmega, 20mhz, Tqfp-32", Package="TQFP-32 Microchip", Digi-Key_Part_Number=ATMEGA328P-AU-ND, Digi-Key_Purchase_URL=https://www.digikey.com/product-detail/en/microchip-technology/ATMEGA328P-AU/ATMEGA328P-AU-ND/1832260?utm_source=snapeda&utm_medium=aggregator&utm_campaign=symbol, MF=Microchip, MP=ATMEGA328P-AU, SnapEDA_Link=https://www.snapeda.com/parts/ATMEGA328P-AU/Microchip/view-part/?ref=snap
C1 C2 C3 C4 C5 C6 C7 C8 C9 C10 cap1 cap_1: "Capacitor (Semiconductor SIM Model)", LatestRevisionDate=29-May-2009, LatestRevisionNote="IPC-7351 Footprint Added.", PackageDescription="Chip Capacitor", PackageReference=C1206, Published=8-Jun-2000, Publisher="Altium Limited"
CRYSTAL1 CRYSTAL_1: "Crystal 16MHz ±30ppm _Tol_ ±50ppm _Stability_ 20pF FUND 40Ohm 2-Pin HC-49/SDLF SMD T/R", Package=None, Availability=Unavailable, MF="Fox Electronics", MP=FOXSDLF/160-20/TR, Price=None, SnapEDA_Link=https://www.snapeda.com/parts/FOXSDLF/160-20/TR/Fox%20Electronics/view-part/?ref=snap
D1 D2 D3 D4: "SS12 Series 20 V 1 A Surface Mount Schottky Barrier Rectifier - DO-214AC _SMA_", Package="DO-214 Vishay", Availability=Unavailable, MF="Vishay Semiconductor", MP=SS12-E3/61T, Price=None, SnapEDA_Link=https://www.snapeda.com/parts/SS12-E3/61T/Vishay%20Semiconductor%20Diodes%20Division/view-part/?ref=snap
"dc connector1" "dc connector_1": "Dc Power Jack, 5a, 20vdc, Black", Package=None, Availability=Unavailable, MF="Global Connector Technology", MP=DCJ235-05-A-K1-A, Price=None, SnapEDA_Link=https://www.snapeda.com/parts/DCJ235-05-A-K1-A/Global%20Connector%20Technology/view-part/?ref=snap
ftdi1 ftdi_1: "Header, 6-Pin", LatestRevisionDate=17-Jul-2002, LatestRevisionNote="Re-released for DXP Platform.", Publisher="Altium Limited"
lm1 lm2: "Dual Operational Amplifiers 8-SOIC 0 to 70", Package="SOIC-8 Texas Instruments", Availability=Unavailable, MF="Texas Instruments", MP=LM358DR, Price=None, SnapEDA_Link=https://www.snapeda.com/parts/LM358DR/Texas%20Instruments/view-part/?ref=snap
mos1 mos_1: "Single N-Channel 100 V 44 mOhm 71 nC HEXFET® Power Mosfet - TO-220-3", Package="TO-220 Infineon", Digi-Key_Part_Number=IRF540NPBF-ND, Digi-Key_Purchase_URL=https://www.digikey.com/product-detail/en/infineon-technologies/IRF540NPBF/IRF540NPBF-ND/811869?utm_source=snapeda&utm_medium=aggregator&utm_campaign=symbol, MF=Infineon, MP=IRF540NPBF, SnapEDA_Link=https://www.snapeda.com/parts/IRF540NPBF/Infineon%20Technologies/view-part/?ref=snap
oled1 oled_1: "Header, 4-Pin", LatestRevisionDate=17-Jul-2002, LatestRevisionNote="Re-released for DXP Platform.", Publisher="Altium Limited"
R1 R2 R3 R4 R5 R6 R7 R8 R9 R10 R12 R13 R14 R15 R16 R18: library part Res3, "Resistor", LatestRevisionDate=29-May-2009, LatestRevisionNote="IPC-7351 Footprint Added.", PackageDescription="Chip Resistor", PackageReference=J1-0603, Published=8-Jun-2000, Publisher="Altium Limited"
R11 R17: "Resistor", LatestRevisionDate=29-May-2009, LatestRevisionNote="IPC-7351 Footprint Added.", PackageDescription="Chip Resistor", PackageReference=J1-0603, Published=8-Jun-2000, Publisher="Altium Limited"
S1 S2 S3 S4: "Single-Pole, Single-Throw Switch", LatestRevisionDate=17-Jul-2002, LatestRevisionNote="Re-released for DXP Platform.", PackageDescription="Switch; 2 Leads", PackageReference=SPST-2, Published=24-Mar-1999, Publisher="Altium Limited"
T1 T2: library part "Header 2", "Header, 2-Pin", LatestRevisionDate=17-Jul-2002, LatestRevisionNote="Re-released for DXP Platform.", Publisher="Altium Limited"
trans1 trans_1: library part SMD-TRANSISTORS-NPN-25V-500MA-S9013(SOT-23), "SMD Transistors NPN 25V-500mA", Package="SOT-23-3 JCET", Availability=Unavailable, MF=JCET, MP=S9013, Price=None, SnapEDA_Link=https://www.snapeda.com/parts/S9013/JCET/view-part/?ref=snap

## Free pads (board coordinates)
  round 1.8 hole 0.9: 3(57.531,68.961) 4(81.153,75.565) 8(58.42,82.55) 11(88.646,76.2) 12(65.659,73.152) 13(90.297,64.389) 14(55.499,60.706) 15(140.335,79.883) 16(80.01,84.455)
  round 1.7 hole 0.9: 5(62.484,57.15) 7(51.181,78.613)
  round 1.524 hole 1.2: 17(159.512,85.217) 18(159.512,46.863) 19(39.878,85.217)
  round 1.524 hole 0.762: 20(39.878,46.863)

## Nets (pads, with @x,y where several pads share a name; then routed paths per layer and width w, separated by ;. In a path a pad name is that pad's centre, name@x,y a point inside that pad or via, vN(x,y) a via of type N, cw(c..) or ccw(c..) an arc to the next point about the centre after c; other vN are vias at no path point)
+5v: atmega1.4 atmega1.6 atmega1.18 atmega1.29 buck1.3 C9.1 ftdi1.4 lm2.8 oled1.2 pad.7 pad.8 R16.1 R18.2 S3.1 S4.1 | length 158.5
  Top Layer w0.4: pad.7 55.626,82.55 pad.8
  Bottom Layer w0.254: 60.464,82.435 60.579,82.55 ; 66.611,64.579 66.611,64.643 ; oled1.2@73.31,80.422 oled1.2
  Bottom Layer w0.4: pad.7 55.015,77.978 55.511,77.482 lm2.8 ; pad.8 60.579,82.55 63.881,85.852 76.2,85.852 ; R16.1 60.464,82.435 ; C9.1 62.404,64.643 66.611,64.643 66.611,65.977 67.291,66.656 atmega1.18 71.482,66.656 72.282,67.456 atmega1.6 78.886,67.456 80.137,68.707 80.137,70.104 80.899,70.866 93.472,70.866 95.504,72.898 buck1.3 ; 66.611,64.579 67.183,64.008 67.183,60.845 S3.1 ; oled1.2@73.31,80.422 atmega1.29 73.31,71.343 75.597,69.056 atmega1.4 ; oled1.2 73.914,83.566 76.2,85.852 ; ftdi1.4 85.09,82.816 ; R18.2 86.475,84.201 85.09,82.816 ; S4.1 90.678,74.93 91.898,76.15 buck1.3 ; 76.2,85.852 77.089,86.741 83.439,86.741 ; 83.439,86.741 85.09,85.09 85.09,82.816 ; 83.439,86.741 96.52,86.741 98.044,85.217 98.044,78.69 buck1.3
DTR: C10.1 ftdi1.1 | length 5
  Bottom Layer w0.4: ftdi1.1 94.107,81.026 94.822,81.741 C10.1
"h gnd": "dc connector1.2" "dc connector1.3" buck1.2 T2.2 trans1.2 | length 111.8
  Bottom Layer w0.254: buck1.2 buck1.2@136.652,56.896
  Bottom Layer w1: T2.2 60.96,62.611 65.024,58.547 65.024,55.499 62.357,52.832 ; trans1.2 62.357,52.832 ; buck1.2@136.652,56.896 137.541,56.007 141.859,56.007 ; 152.441,56.007 141.859,56.007 ; 62.357,52.832 63.119,52.07 137.922,52.07 141.859,56.007
"l gnd": *1.2 atmega1.3 atmega1.5 atmega1.21 buck1.4 C5.1 C6.1 C8.1 C9.2 cap1.1 D3.A ftdi1.6 oled1.1 pad.3 pad.11 pad.12 pad.13 pad.16 R7.1 R13.1 R15.1 | length 176.8
  Top Layer w0.254: ftdi1.6@80.01,80.391 ftdi1.6 pad.16
  Top Layer w0.4: pad.3 61.722,73.152 pad.12 70.739,78.232 82.169,78.232 ; ftdi1.6@80.01,80.391 82.169,78.232 ; pad.13 88.138,66.548 88.138,74.676 pad.11 84.582,78.232 82.169,78.232
  Bottom Layer w0.254: D3.A D3.A@36.514,76.026 ; cap1.1@42.356,75.964 cap1.1@42.374,75.946 ; 60.198,72.39 60.325,72.263 ; C9.2@60.626,68.961 C9.2 ; C8.1 64.232,69.041 C8.1@64.247,69.056 ; 64.77,72.263 pad.12 ; C5.1@86.36,60.278 86.372,60.278 C5.1 ; 86.36,63.258 86.372,63.246 ; C6.1@86.36,64.436 C6.1 ; pad.11@88.531,76.315 pad.11 ; pad.13@90.25,64.436 pad.13
  Bottom Layer w0.4: D3.A@36.514,76.026 cap1.1 ; cap1.1@42.374,75.946 R13.1 47.002,81.038 48.133,82.169 55.499,82.169 60.198,77.47 *1.2 60.198,72.39 ; pad.3 C9.2@60.626,68.961 ; 60.325,72.263 64.77,72.263 ; C9.2 C8.1 ; C8.1@64.247,69.056 atmega1.21 73.311,69.056 74.111,68.256 atmega1.5 78.486,68.256 78.74,68.51 78.74,69.723 78.607,69.856 atmega1.3 ; R7.1 77.851,55.88 80.137,53.594 91.948,53.594 buck1.4 92.376,60.278 C5.1 ; oled1.1 ftdi1.6 pad.16 ; R15.1 82.943,76.315 pad.11@88.531,76.315 ; 86.36,63.258 C6.1@86.36,64.436 ; C5.1@86.372,60.278 86.372,63.246 ; C6.1 pad.13@90.25,64.436
LBUT: atmega1.2 R15.2 S4.2 | length 12.1
  Bottom Layer w0.4: atmega1.2 79.546,70.656 81.534,72.644 S4.2 85.598,73.902 R15.2
Netatmega_1: atmega1.1 R10.2 | length 4.1
  Bottom Layer w0.4: atmega1.1 77.21,72.644 78.728,74.162 R10.2
Netatmega_7: atmega1.7 C6.2 CRYSTAL1.2 | length 9.6
  Bottom Layer w0.254: CRYSTAL1.2@81.857,66.656 CRYSTAL1.2
  Bottom Layer w0.4: atmega1.7 CRYSTAL1.2@81.857,66.656 ; CRYSTAL1.2 85.512,67.107 85.541,67.136 C6.2
Netatmega_8: atmega1.8 C5.2 CRYSTAL1.1 | length 16.6
  Bottom Layer w0.254: C5.2@86.331,57.607 C5.2@86.36,57.578
  Bottom Layer w0.4: atmega1.8 79.178,65.856 79.756,65.278 79.756,58.42 80.569,57.607 CRYSTAL1.1 C5.2@86.331,57.607
Netatmega_20: atmega1.20 C8.2 | length 5.3
  Bottom Layer w0.4: C8.2 65.465,66.341 67.38,68.256 atmega1.20
Netbuck_1: buck1.1 D4.C mos1.2 pad.14 pad.15 R6.2 | length 121.6
  Top Layer w1: pad.14 55.499,58.166 59.563,54.102 87.122,54.102 112.903,79.883 pad.15
  Bottom Layer w0.254: 55.499,58.42 55.626,58.293 ; R6.2 57.924,58.293 R6.2@58.051,58.42 ; D4.C@143.415,75.896 D4.C
  Bottom Layer w0.8: mos1.2@50.038,58.293 55.626,58.293 R6.2@57.924,58.293
  Bottom Layer w1: 55.499,58.42 pad.14 ; buck1.1 140.97,75.896 ; pad.15 140.335,76.531 140.97,75.896 ; D4.C@143.415,75.896 140.97,75.896
NetC5_2: C10.2 R18.1 | length 3.4
  Bottom Layer w0.254: C10.2@91.995,84.201 C10.2
  Bottom Layer w0.4: R18.1 C10.2@91.995,84.201
Netcap_2: cap1.2 D3.C lm2.3 R14.2 | length 26
  Bottom Layer w0.4: D3.C 42.273,71.991 42.418,72.136 ; R14.2 43.549,69.354 42.418,70.485 42.418,72.136 ; lm2.3 52.971,68.973 52.578,68.58 50.419,68.58 45.673,73.326 cap1.2 42.418,72.136
NetD1_A: "dc connector1.1" D4.A | length 16.6
  Bottom Layer w1: D4.A 147.592,62.522 149.908,60.206
Netlm35dr_2: lm2.2 lm2.4 R13.2 R17.1 | length 23.6
  Bottom Layer w0.4: R17.1 53.086,79.883 51.816,81.153 49.149,81.153 48.502,80.506 R13.2 48.502,72.91 50.597,70.815 lm2.4 51.701,72.275 52.07,72.644 53.848,72.644 54.241,72.251 lm2.2
Netmos_1: mos1.1 R6.1 trans1.3 | length 32.2
  Bottom Layer w0.8: 58.039,53.721 58.039,55.753 59.551,57.265 R6.1
  Bottom Layer w1: mos1.1 37.465,52.578 39.751,50.292 54.61,50.292 58.039,53.721 trans1.3
NetR2_1: pad.4 pad.5 R10.1 trans1.1 | length 35.8
  Top Layer w0.4: pad.5@62.307,57.212 62.367,57.27 pad.4
  Bottom Layer w0.254: trans1.1@60.96,54.737 trans1.1
  Bottom Layer w0.4: trans1.1 61.087,56.769 pad.5 ; R10.1 77.228,76.085 77.724,76.581 80.264,76.581 pad.4
RBUT: atmega1.11 R7.2 S3.2 | length 8.6
  Bottom Layer w0.254: S3.2@74.11,58.998 S3.2
  Bottom Layer w0.4: S3.2@74.11,58.998 atmega1.11 ; R7.2 S3.2
RX: atmega1.30 ftdi1.3 | length 19.3
  Bottom Layer w0.4: atmega1.30 74.11,77.158 75.819,78.867 85.471,78.867 ftdi1.3
SCL: atmega1.28 oled1.3 | length 8.5
  Bottom Layer w0.4: oled1.3 71.374,78.867 72.51,77.731 atmega1.28
SDA: atmega1.27 oled1.4 | length 9.3
  Bottom Layer w0.4: oled1.4 68.834,79.248 71.71,76.372 atmega1.27
TEMP: atmega1.23 lm2.1 R17.2 | length 23.5
  Bottom Layer w0.254: lm2.1 lm2.1@55.67,70.656
  Bottom Layer w0.4: R17.2 56.388,79.883 56.896,79.375 56.896,70.815 ; lm2.1@55.67,70.656 atmega1.23
"TEMP SENSE": mos1.3 R14.1 T2.1 | length 34.9
  Bottom Layer w0.254: mos1.3@37.91,61.531 mos1.3@38.608,60.833
  Bottom Layer w0.4: R14.1 45.835,70.854 49.506,67.183 ; 45.656,67.246 45.72,67.183 49.506,67.183 ; T2.1 58.166,64.262 55.245,67.183 49.506,67.183
  Bottom Layer w0.8: 43.815,65.405 45.656,67.246
  Bottom Layer w1: mos1.3 37.465,62.738 40.132,65.405 43.815,65.405
TX: atmega1.31 ftdi1.2 | length 20
  Bottom Layer w0.4: atmega1.31 74.91,75.418 77.216,77.724 86.868,77.724 ftdi1.2
VIB: *1.1 atmega1.24 R16.2 | length 14
  Bottom Layer w0.254: *1.1@61.964,74.688 *1.1 *1.1@62.23,74.93
  Bottom Layer w0.4: *1.1@61.964,74.688 R16.2 ; *1.1@62.23,74.93 67.183,74.93 68.61,73.503 atmega1.24
pads on no net: "dc connector1.None" "dc connector_1.1" "dc connector_1.2" "dc connector_1.3" "dc connector_1.None" *_1.1 *_1.2 atmega1.9 atmega1.10 atmega1.12 atmega1.13 atmega1.14 atmega1.15 atmega1.16 atmega1.17 atmega1.19 atmega1.22 atmega1.25 atmega1.26 atmega1.32 atmega_1.1 atmega_1.2 atmega_1.3 atmega_1.4 atmega_1.5 atmega_1.6 atmega_1.7 atmega_1.8 atmega_1.9 atmega_1.10 atmega_1.11 atmega_1.12 atmega_1.13 atmega_1.14 atmega_1.15 atmega_1.16 atmega_1.17 atmega_1.18 atmega_1.19 atmega_1.20 atmega_1.21 atmega_1.22 atmega_1.23 atmega_1.24 atmega_1.25 atmega_1.26 atmega_1.27 atmega_1.28 atmega_1.29 atmega_1.30 atmega_1.31 atmega_1.32 buck_1.1 buck_1.2 buck_1.3 buck_1.4 C1.1 C1.2 C2.1 C2.2 C3.1 C3.2 C4.1 C4.2 C7.1 C7.2 cap_1.1 cap_1.2 CRYSTAL_1.1 CRYSTAL_1.2 D1.A D1.C D2.A D2.C ftdi1.5 ftdi_1.1 ftdi_1.2 ftdi_1.3 ftdi_1.4 ftdi_1.5 ftdi_1.6 lm1.1 lm1.2 lm1.3 lm1.4 lm1.5 lm1.6 lm1.7 lm1.8 lm2.5 lm2.6 lm2.7 mos_1.1 mos_1.2 mos_1.3 oled_1.1 oled_1.2 oled_1.3 oled_1.4 R1.1 R1.2 R2.1 R2.2 R3.1 R3.2 R4.1 R4.2 R5.1 R5.2 R8.1 R8.2 R9.1 R9.2 R11.1 R11.2 R12.1 R12.2 S1.1 S1.2 S2.1 S2.2 T1.1 T1.2 trans_1.1 trans_1.2 trans_1.3
copper on no net: | length 346.7
  Top Layer w0.254: 165.735,84.963 165.735,85.703 163.173,88.265 36.195,88.265 32.385,84.455 32.385,52.451 39.37,45.466 160.782,45.466 165.735,50.419 165.735,85.344
  Bottom Layer w0.254: 153.068,56.783 153.068,57.933 155.591,60.456

## Silkscreen, mask and mechanical layers (free items; w line width, h text height)
Bottom Overlay:
  lines w0.254: 32.385,52.451 39.37,45.466 160.782,45.466 165.735,50.419 165.735,85.725 163.195,88.265 36.195,88.265 32.385,84.455 32.385,52.451